# EAGLE board IC4KL_due_cont (EAGLE 9.6.2)
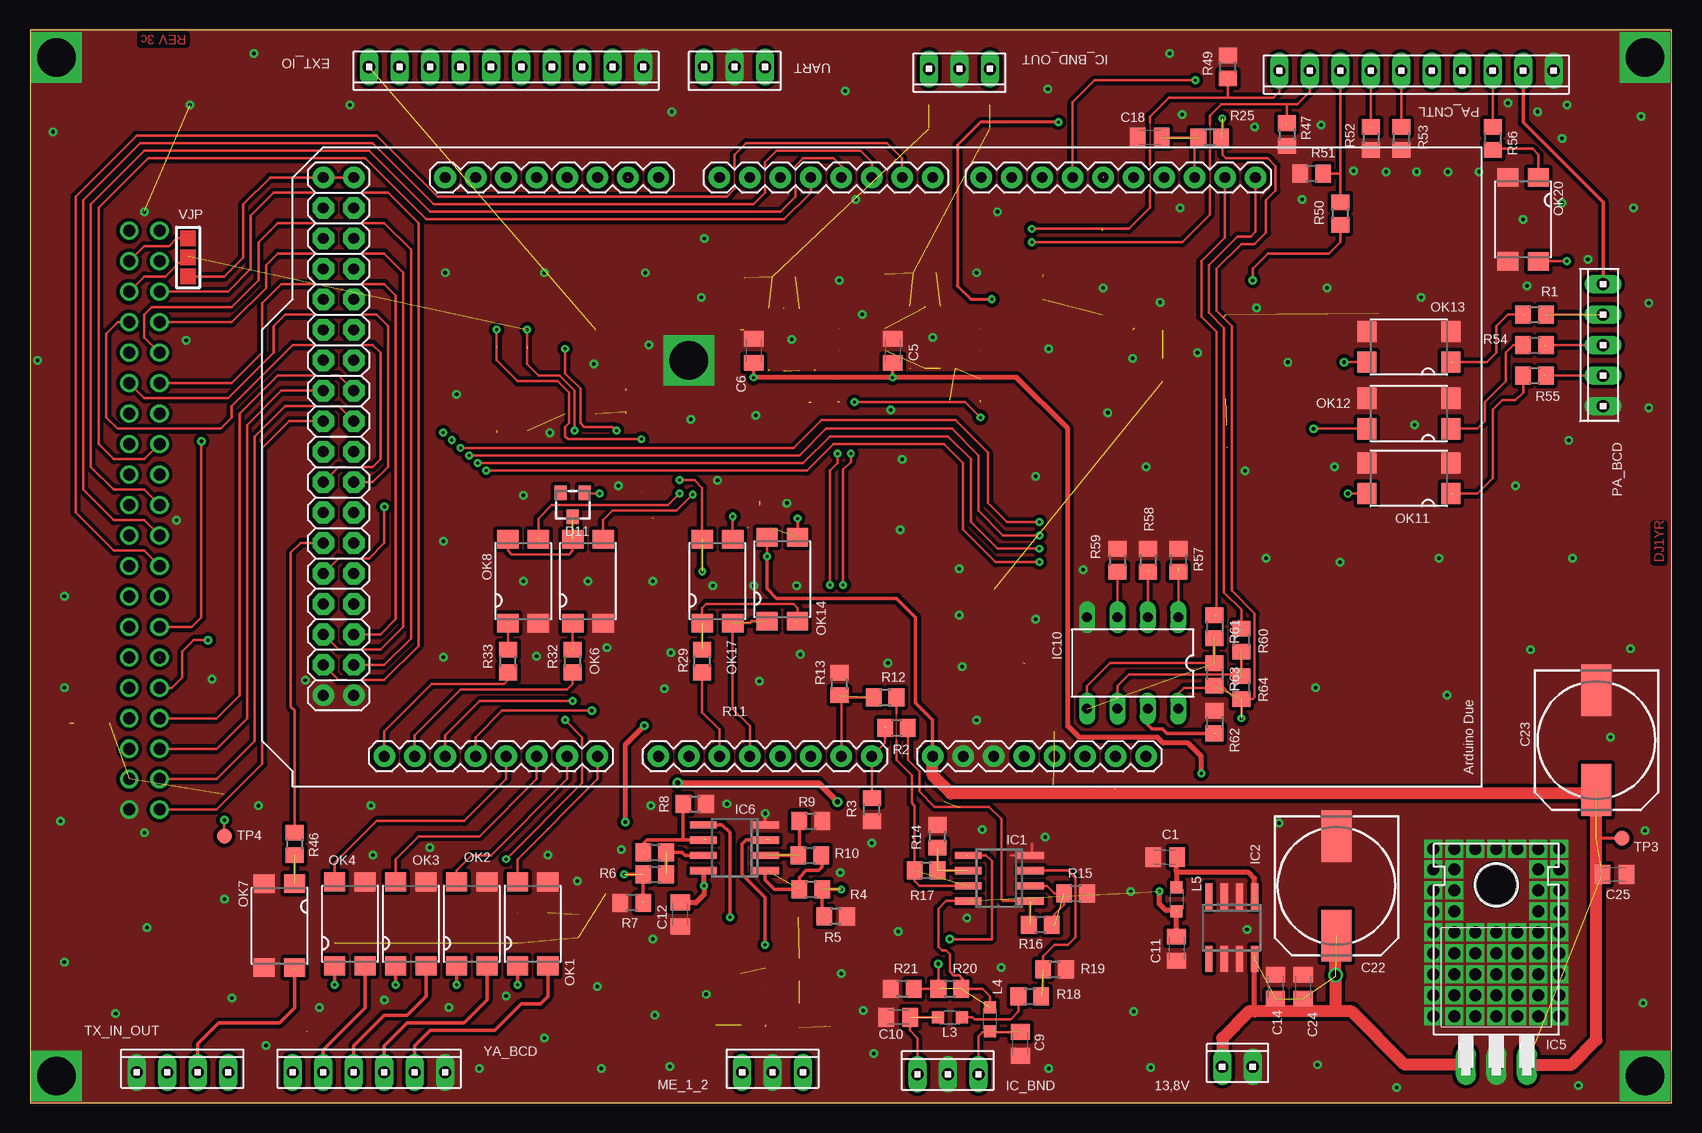
[diagram p0: board, top side]
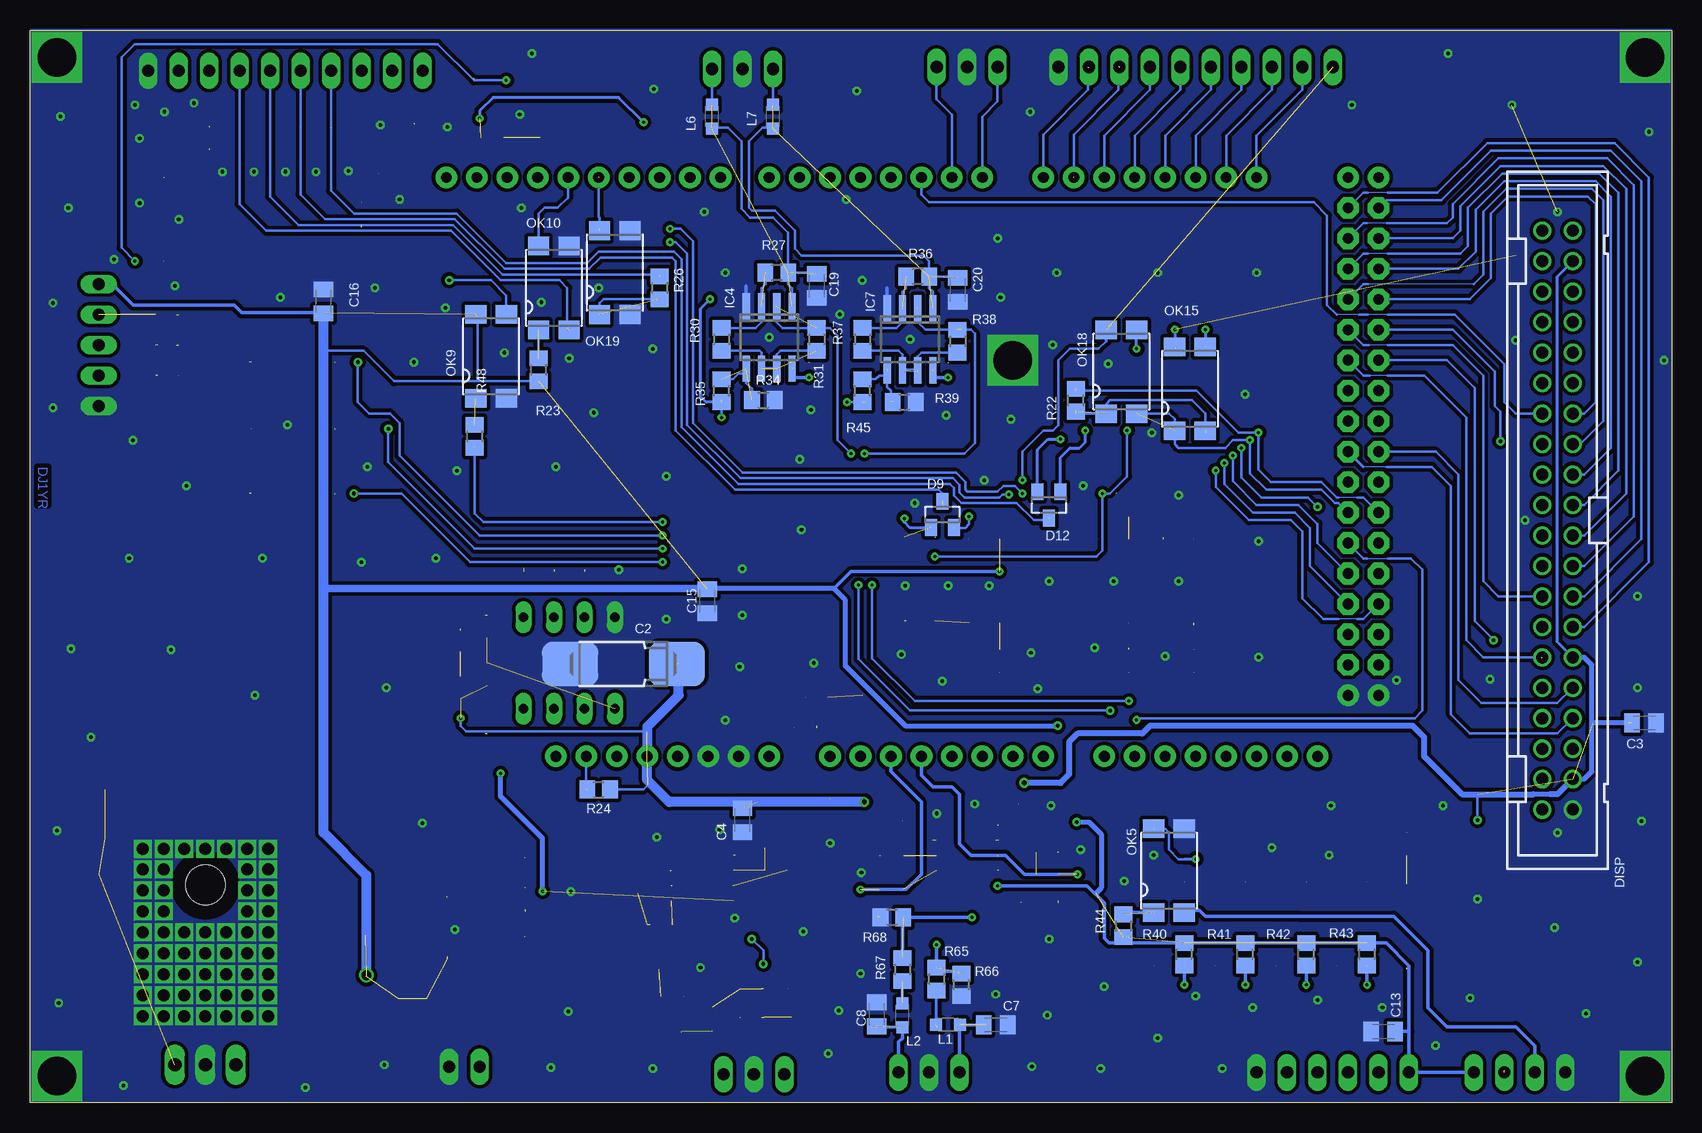
[diagram p1: board, bottom side, seen from below]

Size 136.86 x 89.44 mm. Coordinates in mm from the lower left corner, seen from the top.
Outline: 0,0 136.86,0 136.86,89.44 0,89.44 0,0
Copper layers (1*16): Top 0.035mm / dielectric 1.5mm / Bottom 0.035mm
Design rules "default *": minimum track width 10mil, minimum drill 24mil, track to track 8mil, track to pad 8mil, pad to pad 8mil, via to via 8mil, smd to smd 8mil, copper to edge 0mil, drill to drill 8mil, minimum pad ring 10mil, minimum via ring 8mil, stop-mask expansion 4mil, vias tented up to drill 0mil, thermal gap 10mil

## Footprints (pad centres in the part's own frame; a part is rotated, then mirrored left to right if it is on the bottom)
10X02MTA = drill 1.016 long: 1 1.27,0; 2 -1.27,0
C0805K = smd 1.3 x 1.6: 1 -1,0; 2 1,0
085CS_1AW = smd 4.7 x 3.7: + 4.45,0; - -4.45,0
150CLZ-1010 = smd 4.3 x 2.5: + 4.15,0; - -4.15,0
SOT23 = smd 1 x 1.4: 1 -0.95,-1.1; 2 0.95,-1.1; 3 0,1.1
TO236 = smd 1 x 1.2: A -1,-1; C 0,1; NC 1,-1
PAK100/2500-40 = drill 1 pad 1.422: 1 -24.13,-1.27; 2 -24.13,1.27; 3 -21.59,-1.27; 4 -21.59,1.27; 5 -19.05,-1.27; 6 -19.05,1.27; 7 -16.51,-1.27; 8 -16.51,1.27; 9 -13.97,-1.27; 10 -13.97,1.27; 11 -11.43,-1.27; 12 -11.43,1.27; 13 -8.89,-1.27; 14 -8.89,1.27; 15 -6.35,-1.27; 16 -6.35,1.27; 17 -3.81,-1.27; 18 -3.81,1.27; 19 -1.27,-1.27; 20 -1.27,1.27; 21 1.27,-1.27; 22 1.27,1.27; 23 3.81,-1.27; 24 3.81,1.27; 25 6.35,-1.27; 26 6.35,1.27; 27 8.89,-1.27; 28 8.89,1.27; 29 11.43,-1.27; 30 11.43,1.27; 31 13.97,-1.27; 32 13.97,1.27; 33 16.51,-1.27; 34 16.51,1.27; 35 19.05,-1.27; 36 19.05,1.27; 37 21.59,-1.27; 38 21.59,1.27; 39 24.13,-1.27; 40 24.13,1.27
10X10MTA = drill 1.016 long: 1 11.43,0; 2 8.89,0; 3 6.35,0; 4 3.81,0; 5 1.27,0; 6 -1.27,0; 7 -3.81,0; 8 -6.35,0; 9 -8.89,0; 10 -11.43,0
SO08 = smd 0.6 x 2.2: 1 -1.905,-2.6; 2 -0.635,-2.6; 3 0.635,-2.6; 4 1.905,-2.6; 5 1.905,2.6; 6 0.635,2.6; 7 -0.635,2.6; 8 -1.905,2.6
TO220H = drill 1.118 long: 1 -2.54,-10.16; 2 0,-10.16; 3 2.54,-10.16 | hole 3.302: 0,4.826
DIL08 = drill 0.813 long: 1 -3.81,-3.81; 2 -1.27,-3.81; 3 1.27,-3.81; 4 3.81,-3.81; 5 3.81,3.81; 6 1.27,3.81; 7 -1.27,3.81; 8 -3.81,3.81
10X03MTA = drill 1.016 long: 1 2.54,0; 2 0,0; 3 -2.54,0
L2012C = smd 1 x 1: 1 -1,0; 2 1,0
SMD4 = smd 1.78 x 1.55: 1 -1.27,-3.5; 2 1.27,-3.5; 3 1.27,3.5; 4 -1.27,3.5
10X05MTA = drill 1.016 long: 1 5.08,0; 2 2.54,0; 3 0,0; 4 -2.54,0; 5 -5.08,0
R0805 = smd 1.3 x 1.5: 1 -0.95,0; 2 0.95,0
B1,27 = smd 1.27 x 1.27: TP 0,0
10X04MTA = drill 1.016 long: 1 3.81,0; 2 1.27,0; 3 -1.27,0; 4 -3.81,0
10X06MTA = drill 1.016 long: 1 6.35,0; 2 3.81,0; 3 1.27,0; 4 -1.27,0; 5 -3.81,0; 6 -6.35,0

## Placement (x,y rotation side)
13,8V  [10X02MTA]  100.65,3.02 0 top
C1  [C0805K]  94.61,20.48 180 top
C2  [085CS_1AW]  87.39,36.59 0 bottom
C3  [C0805K]  2.3,31.67 0 bottom
C4  [C0805K]  77.47,23.57 270 bottom
C5  [C0805K]  71.91,62.71 90 top
C6  [C0805K]  60.33,62.71 90 top
C7  [C0805K]  56.36,6.51 180 bottom
C8  [C0805K]  66.28,7.38 90 bottom
C9  [C0805K]  82.55,4.92 270 top
C10  [C0805K]  72.39,7.14 0 top
C11  [C0805K]  95.57,12.86 270 top
C12  [C0805K]  54.21,15.72 90 top
C13  [C0805K]  24.05,5.95 0 bottom
C14  [C0805K]  103.82,9.68 90 top
C15  [C0805K]  80.41,41.83 90 bottom
C16  [C0805K]  112.39,66.83 270 bottom
C18  [C0805K]  93.34,80.49 0 top
C19  [C0805K]  71.28,68.1 270 bottom
C20  [C0805K]  59.53,67.79 270 bottom
C22  [150CLZ-1010]  108.9,18.1 270 top
C23  [150CLZ-1010]  130.57,30.24 270 top
C24  [C0805K]  106.12,9.68 90 top
C25  [C0805K]  132.08,19.05 0 top
D9  [SOT23]  60.8,49.05 0 bottom
D11  BZX84CSMD  [TO236]  45.24,49.85 180 top
D12  [SOT23]  51.91,49.85 180 bottom
DISP  2540-  [PAK100/2500-40]  9.53,48.58 90 bottom
EXT_IO  [10X10MTA]  39.69,86.36 180 top
IC1  LM358D  [SO08]  80.8,18.73 90 top
IC2  78L10SMD  [SO08]  100.17,14.61 180 top
IC4  LM358D  [SO08]  75.25,63.82 180 bottom
IC5  7805T  [TO220H]  122.24,13.34 0 top
IC6  LM358D  [SO08]  58.74,21.27 90 top
IC7  LM358D  [SO08]  63.5,63.66 180 bottom
IC10  AT24CP  [DIL08]  91.92,36.67 180 top
IC_BND  [10X03MTA]  76.52,2.38 0 top
IC_BND_OUT  [10X03MTA]  77.47,86.2 180 top
L1  [L2012C]  60.33,6.51 180 bottom
L2  [L2012C]  64.14,7.3 90 bottom
L3  [L2012C]  76.68,7.14 0 top
L4  [L2012C]  80.01,6.99 90 top
L5  [L2012C]  95.57,16.99 270 top
L6  [L2012C]  80.01,82.23 90 bottom
L7  [L2012C]  74.93,82.23 90 bottom
ME_1_2  [10X03MTA]  61.91,2.54 0 top
OK1  SFH6186-3  [SMD4]  41.91,14.92 0 top
OK2  SFH6186-3  [SMD4]  36.83,14.92 0 top
OK3  SFH6186-3  [SMD4]  31.75,14.92 0 top
OK4  SFH6186-3  [SMD4]  26.67,14.92 0 top
OK5  SFH6186-3  [SMD4]  41.91,19.37 0 bottom
OK6  SFH6186-3  [SMD4]  46.51,43.5 0 top
OK7  SFH6186-3  [SMD4]  20.8,14.76 180 top
OK8  SFH6186-3  [SMD4]  41.12,43.5 0 top
OK9  SFH6186-3  [SMD4]  98.42,62.23 0 bottom
OK10  SFH6186-3  [SMD4]  93.19,67.94 0 bottom
OK11  SFH6186-3  [SMD4]  114.94,52.07 90 top
OK12  SFH6186-3  [SMD4]  114.94,57.47 90 top
OK13  SFH6186-3  [SMD4]  114.94,63.02 90 top
OK14  SFH6186-3  [SMD4]  62.71,43.66 0 top
OK15  SFH6186-3  [SMD4]  40.16,59.53 0 bottom
OK17  SFH6186-3  [SMD4]  57.31,43.5 0 top
OK18  SFH6186-3  [SMD4]  45.88,60.96 0 bottom
OK19  SFH6186-3  [SMD4]  88.11,69.22 0 bottom
OK20  SFH6186-3  [SMD4]  124.46,73.66 180 top
PA_BCD  [10X05MTA]  131.13,63.18 90 top
PA_CNTL  [10X10MTA]  115.57,86.04 180 top
R1  1k  [R0805]  125.41,65.72 0 top
R2  1k  [R0805]  72.23,31.27 0 top
R3  1.8k  [R0805]  70.17,24.45 90 top
R4  1k  [R0805]  65.09,17.78 180 top
R5  1.8k  [R0805]  67.15,15.56 180 top
R6  1k  [R0805]  52.07,19.05 0 top
R7  1.8k  [R0805]  50.16,16.67 180 top
R8  220k  [R0805]  55.4,24.92 0 top
R9  220k  [R0805]  65.09,23.5 0 top
R10  1k  [R0805]  65.01,20.64 0 top
R11  1k  [R0805]  52.07,20.88 0 top
R12  1k  [R0805]  71.28,33.81 0 top
R13  1.8k  [R0805]  67.47,34.92 90 top
R14  220k  [R0805]  75.64,22.23 90 top
R15  220k  [R0805]  87.15,17.46 0 top
R16  1k  [R0805]  84.22,14.84 180 top
R17  1k  [R0805]  74.69,19.37 180 top
R18  1k  [R0805]  83.34,8.89 0 top
R19  10k  [R0805]  85.41,11.11 180 top
R20  1k  [R0805]  76.68,9.53 0 top
R21  10k  [R0805]  72.71,9.53 0 top
R22  1k  [R0805]  49.69,58.58 90 bottom
R23  1k  [R0805]  94.46,61.12 90 bottom
R24  10  [R0805]  89.46,26.11 0 bottom
R25  10  [R0805]  98.35,80.49 180 top
R26  1k  [R0805]  84.38,67.94 270 bottom
R27  100k  [R0805]  74.61,69.22 180 bottom
R29  1k  [R0805]  56.04,36.83 90 top
R30  22k  [R0805]  79.22,63.66 270 bottom
R31  100k  [R0805]  71.28,63.66 270 bottom
R32  1k  [R0805]  45.24,36.83 90 top
R33  1k  [R0805]  39.85,36.83 90 top
R34  22k  [R0805]  75.72,58.58 0 bottom
R35  22k  [R0805]  79.22,59.37 90 bottom
R36  100k  [R0805]  62.87,68.9 180 bottom
R37  22k  [R0805]  67.47,63.66 270 bottom
R38  100k  [R0805]  59.53,63.5 270 bottom
R39  22k  [R0805]  63.98,58.42 0 bottom
R40  1k  [R0805]  40.64,12.38 90 bottom
R41  1k  [R0805]  35.56,12.38 90 bottom
R42  1k  [R0805]  30.48,12.38 90 bottom
R43  1k  [R0805]  25.4,12.38 90 bottom
R44  1k  [R0805]  45.72,14.76 270 bottom
R45  22k  [R0805]  67.47,59.37 90 bottom
R46  390R  [R0805]  22.07,21.59 270 top
R47  100k  [R0805]  104.78,80.72 270 top
R48  1k  [R0805]  99.77,55.56 90 bottom
R49  100k  [R0805]  99.85,86.36 90 top
R50  10  [R0805]  109.22,74.14 90 top
R51  100k  [R0805]  106.84,77.47 180 top
R52  100k  [R0805]  111.76,80.41 270 top
R53  100k  [R0805]  114.3,80.41 270 top
R54  1k  [R0805]  125.41,63.18 0 top
R55  1k  [R0805]  125.41,60.64 0 top
R56  1k  [R0805]  121.92,80.41 270 top
R57  1k  [R0805]  95.73,45.24 270 top
R58  1k  [R0805]  93.19,45.24 270 top
R59  1k  [R0805]  90.65,45.24 270 top
R60  1k  [R0805]  100.97,38.58 270 top
R61  1k  [R0805]  98.74,39.69 270 top
R62  1k  [R0805]  98.74,31.75 270 top
R63  1k  [R0805]  98.74,35.72 270 top
R64  1k  [R0805]  100.97,34.61 270 top
R65  1k  [R0805]  61.28,10.32 90 bottom
R66  2k2  [R0805]  59.21,9.84 90 bottom
R67  1k  [R0805]  64.14,11.11 270 bottom
R68  2k2  [R0805]  65.01,15.48 0 bottom
TP3  TPB1,27  [B1,27]  132.72,22.07 0 top
TP4  TPB1,27  [B1,27]  16.19,22.23 0 top
TX_IN_OUT  [10X04MTA]  12.7,2.54 0 top
UART  [10X03MTA]  58.74,86.36 180 top
YA_BCD  [10X06MTA]  28.26,2.54 0 top

## Library data of the parts
13,8V IC_BND IC_BND_OUT ME_1_2 PA_BCD TX_IN_OUT UART YA_BCD = con-amp; OC_FARNELL: unknown; OC_NEWARK: unknown
C1-C16 C18-C20 C22-C25 L1-L7 R1-R27 R29-R68 = rcl
D9 D11 D12 = diode
DISP = con-3m; OC_FARNELL: unknown; OC_NEWARK: unknown
EXT_IO PA_CNTL = con-amp
IC1 IC2 IC4-IC7 = linear
IC10 = atmel; MPN: AT24C1024BW-SH-B; OC_FARNELL: 1362646; OC_NEWARK: 03P2044
OK1-OK15 OK17-OK20 = optocoupler; MF: VISHAY/TELEFUNKEN; MPN: SFH6186-3; OC_FARNELL: 1469529; OC_NEWARK: 21H7751
TP3 TP4 = testpad

## Nets
3.3V: C2.+ C3.1 C4.1 DISP.3 DISP.11 DISP.37 IC10.8 R24.2 R25.1 R35.1 R45.1 R63.2 R64.2 TP4.TP
5VIN: C23.+ C25.1 D11.A DISP.35 IC5.3 OK14.4 OK15.4 TP3.TP
10V_BND_OPV: C5.1 C6.1 IC1.8 IC4.8 IC7.8
12V: 13,8V.2 C12.2 C13.2 C14.1 C15.2 C16.2 C22.+ C24.1 EXT_IO.1 IC2.8 IC5.1 IC6.8 OK9.4 OK17.4 OK18.4 PA_BCD.1 PA_CNTL.9 R23.1 R40.2 R41.2 R42.2 R43.2 R44.2 TX_IN_OUT.1 YA_BCD.6
BCDA: OK1.4
BCDB: OK2.4
BCDC: OK3.4
BCDD: OK4.4
CS: DISP.29
DAC_IC_BND_OUT: IC4.2 R31.1
DAC_IC_BND_REF_OUT: IC7.2 R38.1
DB0: DISP.2
DB1: DISP.4
DB2: DISP.6
DB3: DISP.8
DB4: DISP.10
DB5: DISP.12
DB6: DISP.14
DB7: DISP.16
DB8: DISP.13
DB9: DISP.15
DB10: DISP.17
DB11: DISP.19
DB12: DISP.21
DB13: DISP.23
DB14: DISP.25
DB15: DISP.27
GND: 13,8V.1 C1.2 C2.- C3.2 C4.2 C5.2 C6.2 C7.1 C8.2 C9.2 C10.1 C11.2 C12.1 C13.1 C14.2 C15.1 C16.1 C18.1 C19.2 C20.2 C22.- C23.- C24.2 C25.2 DISP.1 EXT_IO.10 IC1.4 IC2.2 IC2.3 IC2.6 IC2.7 IC4.4 IC5.2 IC6.4 IC7.4 IC10.4 IC_BND.2 IC_BND_OUT.2 ME_1_2.2 OK1.3 OK2.3 OK3.3 OK4.3 OK5.3 OK6.2 OK7.2 OK7.3 OK8.2 OK9.2 OK10.3 OK11.2 OK11.3 OK12.2 OK12.3 OK13.2 OK13.3 OK19.2 OK19.3 OK20.2 OK20.3 PA_BCD.5 PA_CNTL.10 R3.1 R5.1 R7.2 R8.2 R9.2 R13.2 R14.2 R15.2 R19.1 R21.1 R34.2 R39.2 R47.2 R49.2 R51.2 R52.2 R53.2 R57.1 R58.1 R59.1 R62.1 R66.1 R68.1 TX_IN_OUT.4 UART.2 YA_BCD.1
IC_B: OK11.4
IC_BND: R2.1 R3.2
IC_BND_IN: C10.2 IC_BND.3 L3.1
IC_BND_OUT: IC_BND_OUT.3 L6.2
IC_BND_REF_IN: C9.1 IC_BND.1 L4.1
IC_BND_REF_OUT: IC_BND_OUT.1 L7.2
IC_C: OK12.4
IC_D: OK13.4
LIN: R33.1
LINEAR: OK8.3 PA_CNTL.1 R49.1
M1: C7.2 L1.1 ME_1_2.3
M2: C8.1 L2.1 ME_1_2.1
ME1: R4.1 R5.2
ME2: R6.1 R7.1
MS1: D9.3 PA_CNTL.5 R53.1
MS2: D12.3 PA_CNTL.4 R52.1
N$1: L2.2 R67.2
N$2: IC6.1 R4.2 R10.2
N$3: OK1.1 R40.1
N$4: L1.2 R65.1
N$5: IC6.7 R6.2 R11.2
N$6: IC6.6 R8.1 R11.1
N$8: IC6.2 R9.1 R10.1
N$9: OK13.1 R1.1
N$10: PA_BCD.2 R1.2
N$13: IC1.1 R2.2 R16.2
N$14: IC1.7 R12.2 R17.2
N$15: IC1.6 R14.1 R17.1
N$16: IC1.2 R15.1 R16.1
N$19: IC7.3 R36.2 R37.1
N$20: IC1.3 R18.2 R19.2
N$21: L4.2 R20.2
N$22: L3.2 R18.1
N$24: D12.1 OK18.3
N$25: IC6.3
N$26: IC6.5
N$30: C1.1 IC2.1 L5.1
N$32: OK6.1 R32.2
N$33: OK8.1 R33.2
N$34: D11.C OK6.4 OK8.4
N$35: IC4.3 R27.2 R30.1
N$36: OK15.2 OK18.1 R22.1
N$39: IC1.5 R20.1 R21.2
N$40: C19.1 IC4.1 L6.1 R27.1
N$41: D12.2 OK15.3
N$42: IC4.6 IC4.7 R30.2 R31.2
N$43: D9.2 OK17.3
N$44: D9.1 OK14.3
N$45: IC7.6 IC7.7 R37.2 R38.2
N$46: IC4.5 R34.1 R35.2
N$47: OK2.1 R41.1
N$48: OK10.1 R23.2
N$49: OK3.1 R42.1
N$52: OK14.2 OK17.1 R29.2
N$53: OK4.1 R43.1
N$55: R24.1
N$56: C18.2 R25.2
N$57: OK19.1 R26.2
N$64: OK7.1 R46.2
N$65: IC7.5 R39.1 R45.2
N$66: OK20.1 R56.2
N$70: C20.1 IC7.1 L7.1 R36.1
N$72: EXT_IO.8
N$73: OK5.1 R44.1
N$74: OK5.2 TX_IN_OUT.3
N$75: EXT_IO.7
N$76: EXT_IO.6
N$77: EXT_IO.5
N$78: OK7.4 TX_IN_OUT.2
N$79: EXT_IO.4
N$81: EXT_IO.3
N$82: EXT_IO.2
N$83: EXT_IO.9
N$85: OK9.3 R50.1
N$88: PA_BCD.3 R54.2
N$89: OK9.1 R48.2
N$91: PA_BCD.4 R55.2
N$92: OK12.1 R54.1
N$93: OK11.1 R55.1
N$97: IC10.3 R59.2
N$98: IC10.2 R58.2
N$99: IC10.1 R57.2
N$100: IC10.7 R62.2
N$102: IC10.5 R61.2 R63.1
N$104: IC10.6 R60.2 R64.1
PRO: OK15.1 OK18.2
PROL: OK10.2 PA_CNTL.7
PROL_MCU: OK10.4
PS_ON: PA_CNTL.3 R50.2 R51.1
PSON: R48.1
REST: DISP.33
RS: DISP.7
RXD: UART.1
S$2: R67.1 R68.2
S$3: R65.2 R66.2
S$4: C11.1 L5.2
S$5: R12.1 R13.1
SCL: R60.1
SD_CLK: DISP.32
SD_CS: DISP.36
SD_DIN: DISP.34
SD_DO: DISP.30
SDA: R61.1
SWR: OK14.1 OK17.2
T_CLK: DISP.18
T_CS: DISP.20
T_DIN: DISP.22
T_DO: DISP.26
T_IRQ: DISP.28
TEMP: R22.2
TUN: R32.1
TUNER: OK6.3 PA_CNTL.2 R47.1
TXD: UART.3
TXIN: OK5.4
TXL: PA_CNTL.8 R56.1
TXL_MCU: OK20.4
TXOUT: R46.1
VC: R29.1
WAIT: PA_CNTL.6 R26.1
WAIT_MCU: OK19.4
WR: DISP.9
Y_A: OK1.2 YA_BCD.2
Y_B: OK2.2 YA_BCD.3
Y_C: OK3.2 YA_BCD.4
Y_D: OK4.2 YA_BCD.5

## Tracks (layer width: path | path; a pad name or v marks a point on that pad's centre or on a via)
3.3V  (via drill 0.25, 0.3, 0.4, 0.9 pad 1.8)  (13 unrouted)
  Top 0.203: DISP.37 9.53,71.44 11.59,71.44 12.22,72.07 13.18,72.07 | v100.97,32.07 R64.2 | R64.2 100.97,33.97 100.17,33.97 99.54,34.61 96.2,34.61 95.73,34.13 IC10.8 | R64.2 101.92,33.66 102.08,33.81 102.08,40.8 100.17,42.7 100.17,64.77 98.9,66.04 98.9,69.53 100.97,71.6 102.08,71.6 103.03,72.55 103.03,75.25 103.82,76.04 103.82,78.11 103.19,78.74 99.69,78.74 99.38,79.06 99.38,80.49 | v68.74,58.42 77.95,58.42 v79.22,57.15 | TP4.TP v16.19,23.57
  Top 0.254: v99.38,82.07 99.38,80.49 | v85.72,81.76 79.22,81.76 77.31,79.85 77.31,68.1 78.42,66.99 v80.17,66.99
  Top 0.508: v53.98,26.67 65.72,26.67 v67.31,25.08
  Bottom 0.203: R24.2 85.72,26.11 85.33,26.51 | v79.22,57.15 R35.1 79.22,58.58 | v68.74,58.42 67.31,58.42 | v100.97,32.07 100.97,31.43 100.49,30.96 85.41,30.96 | v16.19,23.57 16.19,25.72
  Bottom 0.254: DISP.37 9.53,68.9 9.53,38.42 DISP.11 | R35.1 80.49,58.42 80.96,58.9 80.96,66.2 v80.17,66.99 | v85.72,81.76 87.79,83.82 98.27,83.82 99.38,82.71 v99.38,82.07
  Bottom 0.406: DISP.11 7.3,37.15 6.67,36.51 6.67,27.62 7.3,26.99 DISP.3 | 10.16,25.72 11.51,25.72 | v67.31,25.08 76.2,25.08 | 3.65,31.67 6.59,31.67
  Bottom 0.508: v53.98,26.67 50.96,26.67 50.24,27.38 50.24,30.08 49.53,30.8 44.13,30.8 43.5,31.43 21.59,31.43 20.64,30.48 20.64,28.89 17.46,25.72 11.51,25.72 | 10.16,25.72 9.53,25.72 DISP.3
  Bottom 0.813: 82.79,36.67 82.79,33.97 85.41,31.35 v85.41,28.89 85.41,26.91 83.58,25.08 v67.31,25.08
5VIN  (via drill 0.25, 0.9 pad 1.8)  (7 unrouted)
  Top 0.203: DISP.35 9.53,68.9 11.27,68.9 13.02,70.64 | v47.47,50.8 46.35,50.8 | OK14.4 v61.44,45.56 | v45.4,56.04 45.4,59.37 44.13,60.64 42.39,60.64 41.43,61.59 v41.43,64.45
  Top 0.254: TP3.TP 130.57,22.07
  Top 0.305: v61.44,45.56 61.44,42.86 62.23,42.07 72.23,42.07 73.82,40.48 73.82,33.34 75.25,31.91 v75.25,28.89
  Top 1.016: v75.25,28.89 75.25,27.3 76.76,25.8 130.57,25.8 130.57,5.24 128.51,3.17 IC5.3
  Bottom 0.203: v61.44,45.56 47.94,45.56 47.47,46.04 v47.47,50.8 46.83,50.8 45.4,52.23 v45.4,56.04
  Bottom 0.254: v41.43,64.45 41.43,62.87
10V_BND_OPV  (via drill 0.25)  (5 unrouted)
  Top 0.305: v60.33,60.48 60.33,61.67 | v71.91,60.48 71.91,61.75
  Top 0.406: v94.14,17.62 94.14,16.59 94.69,16.03 95.65,16.03 | v97.63,27.46 97.63,28.89 96.52,30 94.46,30 93.98,30.48 87.47,30.48 86.52,31.43 86.52,56.2 82.23,60.48 v71.91,60.48 v60.33,60.48
  Bottom 0.305: v60.33,60.48 61.59,60.48 61.59,61.12 | v71.91,60.48 73.34,60.48 73.34,61.28
  Bottom 0.406: v94.14,17.62 94.14,22.07 97.63,25.56 v97.63,27.46
12V  (via drill 0.25, 0.3)  (21 unrouted)
  Top 0.203: v56.04,44.29 56.04,51.28 55.4,51.91 v54.13,51.91
  Top 0.305: PA_CNTL.9 124.46,81.76 131.13,75.09 PA_BCD.1
  Top 0.406: 56.2,19.37 v56.2,18.1 56.2,17.38 55.48,16.67 54.29,16.67 | 102.08,7.62 102.08,12.22 | v51.2,31.43 49.61,29.84 v49.61,23.42
  Top 1.016: 13,8V.2 99.38,5.4 101.6,7.62 102.08,7.62 110.17,7.62 114.62,3.17 IC5.1
  Bottom 0.203: R23.1 99.54,60.17 | 99.54,60.17 106.52,60.17 109.06,62.71 112.39,62.71 | v54.13,51.91 54.13,54.29 52.39,56.04 51.59,56.04 51.12,56.52 51.12,61.91 50.16,62.87 47.78,62.87 47.15,63.5 | 99.54,65.56 99.54,60.17
  Bottom 0.254: 47.15,63.5 OK18.4
  Bottom 0.305: 21.91,5.95 YA_BCD.6 TX_IN_OUT.1 | 21.91,5.95 21.91,11.43 23.81,13.34 45.72,13.34 | 45.72,13.34 46.91,13.34 47.31,13.73 47.31,16.67 48.74,18.1 v56.2,18.1 | PA_BCD.1 130.02,68.26 128.27,66.52 119.86,66.52 119.22,65.88 112.39,65.88 | v56.04,44.29 68.42,44.29 69.85,42.86 | 45.72,13.34 R44.2 | 23.1,5.95 21.91,5.95
  Bottom 0.406: 80.64,42.86 69.85,42.86 68.9,41.91 68.9,36.43 63.9,31.43 v51.2,31.43 | v49.61,23.42 48.58,23.42 47.55,22.38 47.55,17.94 48.02,17.46
  Bottom 0.61: 80.64,42.86 112.39,42.86
  Bottom 0.813: 112.39,65.88 112.39,62.71 112.39,42.86 112.39,22.54 108.82,18.97 108.82,10.56
BCDA  (via drill 0.9 pad 1.8)  (1 unrouted)
  Top 0.203: OK1.4 40.64,20.32 47.31,26.99 v47.31,28.89
BCDB  (via drill 0.9 pad 1.8)  (1 unrouted)
  Top 0.203: v44.77,28.89 44.77,26.99 38.42,20.64 36.83,20.64 35.56,19.37 OK2.4
BCDC  (via drill 0.9 pad 1.8)  (1 unrouted)
  Top 0.203: v42.23,28.89 42.23,26.99 37.47,22.23 32.38,22.23 30.48,20.32 OK3.4
BCDD  (via drill 0.9 pad 1.8)  (1 unrouted)
  Top 0.203: v39.69,28.89 39.69,26.99 36.2,23.5 28.89,23.5 25.4,20 OK4.4
CS  (via drill 0.9 pad 1.8)
  Top 0.102: 23.65,65.72 27.78,65.72
  Top 0.203: DISP.29 9.53,58.74 16.51,58.74 20.32,62.55 20.32,64.77 21.27,65.72 23.65,65.72 | v26.99,51.75 28.57,51.75 29.84,53.02 29.84,64.77 28.89,65.72 27.78,65.72
DAC_IC_BND_OUT  (via drill 0.25, 0.3, 0.9 pad 1.8)  (2 unrouted)
  Top 0.203: v46.83,32.7 39.37,32.7 37.15,30.48 v37.15,28.89 | v67.79,43.18 67.79,52.78 68.42,53.42 v68.42,54.13
  Bottom 0.203: v46.83,32.7 63.5,32.7 67.79,36.99 v67.79,43.18 | v68.42,54.13 69.53,55.24 69.53,63.98 70.17,64.61 74.14,64.61 74.61,65.09 74.61,66.36
DAC_IC_BND_REF_OUT  (via drill 0.25, 0.9 pad 1.8)  (3 unrouted)
  Top 0.203: v45.24,33.5 37.47,33.5 34.61,30.64 v34.61,28.89 | v66.67,43.18 66.67,52.7 67.31,53.34 v67.31,54.13
  Bottom 0.203: v45.24,33.5 63.1,33.5 66.67,37.07 v66.67,43.18 | 59.21,64.45 58.42,64.45 58.1,64.14 58.1,55.01 58.98,54.13 v67.31,54.13 | R38.1 62.23,64.45 62.87,65.09 62.87,66.2
DB0  (via drill 0.9 pad 1.8)
  Top 0.203: DISP.2 15.56,24.45 19.37,28.26 19.37,54.61 21.59,56.83 v24.45,56.83
DB1  (via drill 0.9 pad 1.8)
  Top 0.102: 23.65,58.1 25.08,58.1
  Top 0.203: DISP.4 15.56,26.99 18.73,30.16 18.73,55.56 21.27,58.1 23.65,58.1 | v26.99,56.83 25.72,58.1 25.08,58.1
DB2  (via drill 0.9 pad 1.8)
  Top 0.203: DISP.6 15.56,29.53 18.1,32.07 18.1,56.52 20.95,59.37 v24.45,59.37
DB3  (via drill 0.9 pad 1.8)
  Top 0.102: 23.65,60.64 25.16,60.64
  Top 0.203: DISP.8 15.56,32.07 17.46,33.97 17.46,57.47 20.64,60.64 23.65,60.64 | v26.99,59.37 25.72,60.64 25.16,60.64
DB4  (via drill 0.3, 0.9 pad 1.8)
  Top 0.203: v14.84,38.58 13.65,38.58 12.7,37.62 12.7,35.48 11.83,34.61 DISP.10
  Bottom 0.203: v24.45,61.91 18.73,61.91 16.43,59.61 16.43,40.16 v14.84,38.58
DB5  (via drill 0.9 pad 1.8)  (1 unrouted)
  Bottom 0.102: 23.65,60.64 25.16,60.64
  Bottom 0.203: 10.87,37.15 15.72,37.15 17.14,38.58 17.14,57.15 20.64,60.64 23.65,60.64 | 25.16,60.64 25.72,60.64 v26.99,61.91
DB6  (via drill 0.3, 0.9 pad 1.8)
  Top 0.203: DISP.14 13.49,39.69 14.29,40.48 v14.29,55.17
  Bottom 0.203: v14.29,55.17 14.29,57.63 14.76,58.1 14.76,60.96 18.26,64.45 v24.45,64.45
DB7  (via drill 0.9 pad 1.8)
  Bottom 0.102: 23.65,63.18 25.24,63.18
  Bottom 0.203: DISP.16 14.45,42.23 15.72,43.5 15.72,60.64 18.26,63.18 23.65,63.18 | 25.24,63.18 25.72,63.18 v26.99,64.45
DB8  (via drill 0.9 pad 1.8)
  Bottom 0.102: 23.65,75.88 25.32,75.88
  Bottom 0.203: DISP.13 7.3,39.69 1.91,45.09 1.91,77.15 4.76,80.01 15.4,80.01 19.53,75.88 23.65,75.88 | v26.99,74.61 25.72,75.88 25.32,75.88
DB9  (via drill 0.9 pad 1.8)
  Bottom 0.203: DISP.15 7.3,42.23 2.54,46.99 2.54,76.83 5.08,79.38 15.08,79.38 19.21,75.25 23.81,75.25 v24.45,74.61
DB10  (via drill 0.9 pad 1.8)
  Bottom 0.102: 23.73,73.34 25.4,73.34
  Bottom 0.203: DISP.17 7.3,44.77 3.17,48.9 3.17,76.52 5.4,78.74 14.45,78.74 18.26,74.93 18.26,73.82 18.73,73.34 23.73,73.34 | v26.99,72.07 25.72,73.34 25.4,73.34
DB11  (via drill 0.9 pad 1.8)
  Bottom 0.203: DISP.19 7.3,47.31 3.81,50.8 3.81,76.2 5.71,78.11 14.29,78.11 17.62,74.77 17.62,72.71 18.26,72.07 v24.45,72.07
DB12  (via drill 0.9 pad 1.8)
  Bottom 0.102: 23.65,70.8 25.32,70.8
  Bottom 0.203: DISP.21 7.3,49.85 4.45,52.7 4.45,75.88 6.03,77.47 14.13,77.47 16.99,74.61 16.99,71.44 17.62,70.8 23.65,70.8 | v26.99,69.53 25.72,70.8 25.32,70.8
DB13  (via drill 0.9 pad 1.8)
  Bottom 0.203: DISP.23 7.3,52.39 5.08,54.61 5.08,75.56 6.35,76.83 13.97,76.83 16.35,74.45 16.35,70.96 17.78,69.53 v24.45,69.53
DB14  (via drill 0.9 pad 1.8)
  Bottom 0.102: 16.51,68.26 25.32,68.26
  Bottom 0.203: DISP.25 7.62,54.93 5.71,56.83 5.71,75.25 6.67,76.2 13.81,76.2 15.72,74.3 15.72,69.06 16.51,68.26 | v26.99,66.99 25.72,68.26 25.32,68.26
DB15  (via drill 0.9 pad 1.8)
  Bottom 0.203: DISP.27 7.3,57.47 6.35,58.42 6.35,74.93 6.99,75.56 13.65,75.56 15.08,74.14 15.08,68.74 16.83,66.99 v24.45,66.99
GND  (via drill 0.3, 0.9 pad 1.8, 1, 3.2)  (1 unrouted)
  Top 0.203: 81.76,20.64 83.5,20.64 83.5,21.59
  Top 0.305: v61.28,24.13 61.28,23.18
  Bottom 0.305: 65.41,66.2 65.41,67.94 | 77.15,66.36 77.15,68.1
  other vias: 2.22,87.15 2.22,2.22 134.62,2.22 134.62,87.15 54.93,61.91 9.53,22.54 15.16,35.32 12.22,48.58 118.75,12.46 117,12.46 117,14.21 120.49,12.46 117,15.95 118.75,15.95 123.98,21.19 125.73,21.19 117,19.45 117,21.19 118.75,21.19 120.49,21.19 122.24,21.19 127.48,21.19 117,17.7 118.75,19.45 118.75,17.7 125.73,19.45 127.48,19.45 118.75,14.21 125.73,15.95 127.48,15.95 125.73,17.7 127.48,17.7 120.49,14.21 122.24,14.21 123.98,14.21 125.73,14.21 127.48,14.21 72.55,47.78 51.91,43.5 71.52,36.67 77.47,40.64 78.9,31.91 41.12,43.5 41.12,50.64 47.31,9.68 67.63,10.79 70.17,21.67 51.91,13.65 52.07,7.3 56.36,9.05 104.14,23.34 42.86,5.4 51.75,24.77 58.1,24.92 60.8,35.16 63.9,43.1 56.91,43.1 46.51,43.5 57.31,51.91 63.1,50.01 60.48,57.31 71.75,57.78 91.92,62.07 51.28,69.22 56.2,72.07 95.89,74.61 94.22,66.75 34.61,69.22 68.82,75.33 67.47,68.58 55.09,56.99 26.67,83.19 69.45,7.7 77.47,44.53 109.22,45.09 104.85,61.75 83.82,40.32 103.03,45.4 107.16,34.61 45.64,18.49 91.76,17.62 101.44,14.45 43.18,20.64 33.34,21.27 28.57,20.64 39.69,8.89 34.92,7.94 29.53,8.57 24.13,7.94 37.47,2.86 47.62,2.86 53.34,3.02 70.33,4.13 67.55,19.21 49.29,21.11 19.68,4.76 53.5,82.63 113.03,77.63 118.19,77.63 134.94,66.67 115.57,77.63 51.59,63.18 42.86,69.22 55.96,67.15 102.08,81.36 93.03,53.02 101.28,52.7 87.79,44.45 108.74,53.02 108.11,67.94 77.71,36.35 118.11,33.97 117.47,45.4 115.41,56.52 115.97,67.15 124.78,68.1 123.83,51.44 125.09,37.78 22.94,35.24 2.86,11.75 34.45,37.15 34.45,46.83 48.1,37.94 60.33,43.1 52.86,34.53 113.9,1.27 84.93,2.86 28.42,24.77 19.05,24.77 16.19,16.99 107.31,3.17 16.83,8.73 7.14,7.46 2.54,23.5 2.86,34.61 2.86,42.23 13.34,83.19 1.91,80.96 0.64,61.91 13.02,63.58 9.53,74.3 35.56,59.05 92,7.62 131.76,30.48 128.59,45.4 128.27,55.24 134.94,57.94 129.86,70.33 133.67,74.61 124.46,73.66 134.3,82.23 89.46,67.94 102.23,66.28 89.85,57.55 67.94,84.38 69.37,65.72 97.31,62.55 96.04,82.39 80.96,11.27 72.39,14.29 84.61,22.15 78.11,15.4 84.93,62.87 83.82,52.23 72.71,53.66 46.99,61.59 64.21,37.39 53.42,37.54 42.23,37.23 49.05,51.44 43.34,55.88 75.25,63.82 63.5,63.66 78.9,69.22 80.64,74.3 106.05,75.33 107.63,81.52 110.33,77.71 120.81,77.63 123.19,83.34 127.71,75.01 18.65,87.47 84.85,84.53 95.01,87.47 125.65,82.63 127.71,80.41 128.11,83.19 122.24,12.46 123.98,12.46 125.73,12.46 127.48,12.46 127.48,10.72 125.73,10.72 123.98,10.72 122.24,10.72 120.49,10.72 118.75,10.72 117,10.72 117,8.97 118.75,8.97 120.49,8.97 122.24,8.97 123.98,8.97 125.73,8.97 127.48,8.97 117,7.22 118.75,7.22 120.49,7.22 122.24,7.22 123.98,7.22 125.73,7.22 127.48,7.22 93.42,2.94 129.06,1.43 134.46,8.33 134.62,22.7 133.43,37.86 9.76,14.61 79.38,22.78 24.45,33.97 26.99,33.97 77.79,28.89 80.33,28.89
  pour Top (isolate 0.305, no thermals): 0,89.53 136.84,89.53 136.84,0 0,0
  pour Bottom (isolate 0.305, no thermals): 0,89.53 136.84,89.53 136.84,0 0,0
IC_B  (via drill 0.25, 0.3, 0.9 pad 1.8)  (1 unrouted)
  Top 0.203: v109.86,50.8 OK11.4 | v84.14,45.09 80.49,45.09 77.79,47.78 77.79,53.34 76.2,54.93 66.99,54.93 64.77,52.7 v38.02,52.7
  Bottom 0.102: 26.19,40.32 27.78,40.32
  Bottom 0.203: v109.86,50.8 105.89,50.8 100.17,45.09 v84.14,45.09 | v24.45,41.59 25.72,40.32 26.19,40.32 | v38.02,52.7 38.02,51.36 35.24,48.58 31.75,48.58 30.8,47.62 30.8,42.07 29.05,40.32 27.78,40.32
IC_BND  (via drill 0.9 pad 1.8)  (2 unrouted)
  Top 0.203: 71.28,31.43 71.28,30 v70.17,28.89 70.17,25.32
IC_BND_IN  (2 unrouted)
  Top 0.203: IC_BND.3 73.98,5.4 73.34,6.03 73.34,7.14 75.88,7.14
IC_BND_OUT  (2 unrouted)
  Bottom 0.203: 73.34,66.36 73.34,67.94 73.66,68.26 73.66,69.22 | 71.28,69.06 71.44,69.22 73.66,69.22 | 73.66,69.22 73.66,72.55 74.93,73.82 76.83,73.82 77.55,74.53 77.55,80.17 78.66,81.28 80.01,81.28 | 80.01,85.57 IC_BND_OUT.3 80.01,83.19
IC_BND_REF  (via drill 0.9 pad 1.8)
  Top 0.203: v67.63,28.89 67.63,33.97 67.79,33.81 70.33,33.81
IC_BND_REF_IN  (2 unrouted)
  Top 0.203: IC_BND.1 79.06,5.56 79.38,5.87 82.55,5.87
IC_BND_REF_OUT  (2 unrouted)
  Bottom 0.203: 74.93,85.41 IC_BND_OUT.1 74.93,83.19 | 61.59,66.2 61.59,67.63 61.91,67.94 61.91,68.9 | 59.53,68.74 59.69,68.9 61.91,68.9 | 61.91,68.9 61.91,70.17 62.39,70.64 72.55,70.64 73.1,71.2 73.1,72.71 74.77,74.37 76.68,74.37 76.91,74.61 76.91,80.17 75.8,81.28 74.93,81.28
IC_C  (via drill 0.25, 0.3, 0.9 pad 1.8)  (1 unrouted)
  Top 0.203: v107,56.2 OK12.4 | v84.14,46.2 80.64,46.2 78.42,48.42 78.42,53.66 76.52,55.56 66.67,55.56 64.45,53.34 v37.31,53.34
  Bottom 0.203: v107,56.2 107,53.42 99.77,46.2 v84.14,46.2 | v26.99,41.59 30.16,44.77 30.16,47.94 31.43,49.21 34.92,49.21 37.31,51.59 v37.31,53.34
IC_D  (via drill 0.25, 0.3, 0.9 pad 1.8)  (1 unrouted)
  Top 0.203: v84.14,47.31 81.12,47.31 79.06,49.37 79.06,53.98 76.83,56.2 66.36,56.2 64.14,53.98 v36.59,53.98 | v109.54,61.75 OK13.4
  Bottom 0.203: v36.59,53.98 36.59,51.83 34.61,49.85 31.11,49.85 29.53,48.26 29.53,46.67 v26.99,44.13 | v84.14,47.31 99.38,47.31 106.05,53.98 106.05,56.67 106.84,57.47 108.58,57.47 109.54,58.42 v109.54,61.75
LIN  (via drill 0.9 pad 1.8)  (1 unrouted)
  Top 0.203: R33.1 39.85,35.24 39.53,34.92 33.5,34.92 29.53,30.96 v29.53,28.89
LINEAR  (via drill 0.25)  (2 unrouted)
  Top 0.102: 93.34,81.76 93.34,79.38 | 93.34,78.26 93.34,76.04
  Top 0.2: 93.34,74.61 93.34,76.04 | 93.34,78.26 93.34,79.38 | 93.34,82.23 93.34,81.76
  Top 0.203: 42.39,47.15 42.39,48.74 43.5,49.85 53.18,49.85 v54.13,50.8 | 93.34,74.61 91.6,72.87 v83.5,72.87 | PA_CNTL.1 104.14,84.3 103.66,83.82 99.85,83.82 | 99.85,83.82 94.93,83.82 93.34,82.23 | 99.85,85.33 99.85,83.82
  Bottom 0.203: v54.13,50.8 54.77,51.44 55.72,51.44 56.2,50.96 58.74,50.96 58.9,51.12 58.9,51.75 59.69,52.55 77.47,52.55 81.6,56.67 81.6,71.83 82.63,72.87 v83.5,72.87
M1  (2 unrouted)
  Bottom 0.254: 59.37,6.51 57.15,6.51
  Bottom 0.305: ME_1_2.3 59.37,6.51
M2  (2 unrouted)
  Bottom 0.254: 66.67,6.35 64.14,6.35
  Bottom 0.305: ME_1_2.1 64.45,5.08 64.14,5.4 64.14,6.35
ME1  (via drill 0.25, 0.9 pad 1.8)  (2 unrouted)
  Top 0.305: 66.04,15.56 R4.1 v67.63,17.78
  Bottom 0.305: v67.63,17.78 63.82,17.78 62.55,19.05 62.55,25.08 65.09,27.62 v65.09,28.89
ME2  (via drill 0.25, 0.9 pad 1.8)  (2 unrouted)
  Top 0.305: 51.12,16.83 R6.1 v49.53,19.05
  Bottom 0.305: v49.53,19.05 53.98,19.05 55.56,20.64 58.42,20.64 59.37,21.59 59.37,25.72 60.01,26.35 61.59,26.35 62.55,27.3 v62.55,28.89
MS1  (2 unrouted)
  Top 0.203: R53.1 PA_CNTL.5
  Bottom 0.203: PA_CNTL.5 114.3,75.72 112.24,73.66 101.44,73.66 97.31,69.53 90.25,69.53 89.3,70.48 83.34,70.48 83.03,70.17 83.03,56.04 78.11,51.12 61.12,51.12 60.8,50.8 60.8,49.85
MS2  (2 unrouted)
  Top 0.203: 111.76,81.28 PA_CNTL.4
  Bottom 0.203: PA_CNTL.4 111.76,76.04 109.86,74.14 101.28,74.14 97.16,70.01 90.41,70.01 89.46,70.96 83.19,70.96 82.55,70.33 82.55,56.36 77.79,51.59 60.17,51.59 59.85,51.28 59.85,50.64 59.21,50.01 54.61,50.01 53.18,48.58 51.91,48.58 51.91,48.74
N$1  (1 unrouted)
N$2  (3 unrouted)
  Top 0.305: 61.28,19.37 61.28,18.57 62.07,17.78 R4.2 64.14,18.81 64.69,19.37 65.72,19.37 66.04,19.68 66.04,20.64
N$3  (1 unrouted)
N$4  (2 unrouted)
  Bottom 0.254: 61.28,6.35 R65.1
N$5  (3 unrouted)
  Top 0.305: 56.2,20.64 54.61,20.64 54.37,20.88 R11.2 R6.2
N$6  (3 unrouted)
  Top 0.305: 56.36,21.91 54.45,21.91 | 54.45,21.91 R8.1 | 54.45,21.91 51.44,21.91 51.2,21.67 51.2,20.88
N$7
  Bottom 0.254: 64.14,8.26 64.14,10.16
N$8  (3 unrouted)
  Top 0.305: R9.1 64.14,20.95 63.82,20.64 61.28,20.64
N$9  (2 unrouted)
  Top 0.203: 118.59,61.75 121.44,61.75 122.24,62.55 122.24,64.77 123.19,65.72 124.62,65.72
N$10  (1 unrouted)
N$11  (via drill 0.25)
  Bottom 0.305: v58.34,15.48 64.14,15.48 64.14,12.06
N$12  (via drill 0.25)
  Bottom 0.305: v61.28,13.18 61.28,10.95 59.37,10.95
N$13  (3 unrouted)
  Top 0.203: 83.34,14.92 83.34,16.83 81.12,16.83 80.96,16.99 80.96,23.65 79.93,24.69 75.41,24.69 74.14,25.96 74.14,27.62 73.18,28.57 R2.2
N$14  (3 unrouted)
  Top 0.102: 72.23,30.16 72.23,32.46 R12.2
  Top 0.203: 78.26,18.1 74.61,18.1 74.14,18.1 73.74,18.49 73.74,24.77 73.5,25 73.5,27.3 72.23,28.57 72.23,30.16 | 72.23,33.89 72.23,32.46
N$15  (2 unrouted)
N$16  (3 unrouted)
  Top 0.203: 85.41,14.84 85.41,15.72 86.2,16.51 R15.1 85.41,17.46 84.77,18.1 83.34,18.1
N$17
  Top 1.016: 130.73,25.96 130.65,25.96
N$18
  Top 0.203: 78.26,19.37 75.64,19.37 75.64,21.19
N$19  (3 unrouted)
  Bottom 0.203: 64.14,66.2 64.14,65.09 64.61,64.61 R37.1
N$20  (3 unrouted)
  Top 0.203: R18.2 84.45,9.05 84.45,12.22 85.41,13.18 86.52,13.18 87.15,13.81 87.15,18.73 86.52,19.37 83.5,19.37
N$21  (1 unrouted)
N$22  (2 unrouted)
  Top 0.203: 77.63,7.14 78.58,7.14 78.74,6.99 81.76,6.99 82.39,7.62 R18.1
N$23
  Top 0.203: 22.07,18.26 22.07,20.48
N$24  (via drill 0.25)  (2 unrouted)
  Top 0.203: v44.61,62.87 44.61,60.8 45.88,59.53 45.88,56.67 46.2,56.36 48.58,56.36 v48.9,56.04
  Bottom 0.254: D12.1 50.96,53.82 50.16,54.61 49.37,54.61 48.9,55.09 v48.9,56.04 | v44.61,62.87 OK18.3
N$25  (1 unrouted)
  Top 0.305: 61.59,21.91 59.69,21.91 59.37,21.59 59.37,19.05 61.28,17.14 61.28,13.18
N$26  (1 unrouted)
  Top 0.305: 56.2,23.18 57.71,23.18 58.34,22.54 58.34,15.56
N$28  (via drill 0.9 pad 1.8)
  Top 0.203: 13.18,68.9 16.19,68.9 17.78,70.48 17.78,74.93 20,77.15 v24.45,77.15 v26.99,77.15
N$29
  Top 0.203: 126.36,65.72 131.29,65.72
N$30  (3 unrouted)
  Top 0.406: 102.08,17.14 102.08,18.73 101.6,19.21 95.57,19.21 | 95.57,19.21 95.57,17.94 | 95.57,19.21 95.57,20.48
N$32  (2 unrouted)
  Top 0.203: 45.24,37.94 OK6.1
N$33  (2 unrouted)
  Top 0.203: R33.2 39.85,39.85
N$34  (3 unrouted)
  Top 0.203: OK8.4 39.85,46.04 40.16,45.72 44.93,45.72 45.24,46.04 45.24,48.74
N$35  (3 unrouted)
  Bottom 0.203: R30.1 76.36,64.61 75.88,65.09 75.88,67.94 75.56,68.26 R27.2
N$36  (3 unrouted)
  Bottom 0.203: 38.89,55.88 38.89,57.47 40.01,58.58 46.83,58.58 47.15,58.26 OK18.1 49.69,57.47
N$39  (via drill 0.3)  (4 unrouted)
  Top 0.203: 80.01,7.94 80.01,8.89 79.38,9.53 77.79,9.53 | 77.79,9.53 77.63,9.53 | 77.79,9.53 77.79,10.32 77.47,10.64 76.99,10.64 76.68,10.95 76.68,12.38 76.36,12.7 76.04,12.7 75.72,13.02 75.72,16.19 76.36,16.83 78.42,16.83 | 75.88,9.53 R20.1 | R20.1 R21.2 | R20.1 v75.72,11.59 | v76.68,13.65 80.17,13.65 80.17,20.16 79.69,20.64 78.11,20.64
  Bottom 0.203: v76.68,13.65 75.72,12.7 v75.72,11.59
N$40  (3 unrouted)
N$41  (via drill 0.25)  (2 unrouted)
  Top 0.203: v38.89,64.45 38.89,61.91 40.64,60.17 43.97,60.17 44.93,59.21 44.93,56.67 44.61,56.36 44.61,55.56 44.85,55.32 v50.96,55.32
  Bottom 0.254: v38.89,64.45 OK15.3 | D12.2 52.86,54.45 51.99,55.32 v50.96,55.32
N$42  (4 unrouted)
  Bottom 0.203: R30.2 76.04,62.71 75.88,62.55 75.88,61.28 74.61,61.28 74.61,62.39 74.3,62.71 R31.2
N$43  (via drill 0.25)  (2 unrouted)
  Top 0.203: OK17.3 v58.58,48.9
  Bottom 0.203: v58.58,48.9 58.58,48.26 58.9,47.94 D9.2
N$44  (1 unrouted)
N$45  (4 unrouted)
  Bottom 0.203: R38.2 62.55,62.55 62.87,62.23 62.87,61.12 | 62.87,61.12 62.87,60.96 | R37.2 64.45,62.71 64.14,62.39 64.14,61.12 62.87,61.12
N$46  (2 unrouted)
N$47  (1 unrouted)
N$48  (1 unrouted)
N$49  (1 unrouted)
N$50  (via drill 0.25)
  Top 0.254: v63.98,48.74 63.98,47.15
  Bottom 0.254: 61.75,47.94 63.5,47.94 63.98,48.42 v63.98,48.74
N$52  (3 unrouted)
  Top 0.203: R29.2 56.04,41.27 56.36,41.59 63.66,41.59 63.98,41.27 OK14.2 63.82,40.16
N$53  (1 unrouted)
N$55  (via drill 0.9 pad 1.8)  (1 unrouted)
  Bottom 0.203: 90.49,26.19 v90.49,28.89
N$56  (1 unrouted)
N$57  (1 unrouted)
N$58  (via drill 0.9 pad 1.8)
  Top 0.203: v97.08,77.15 97.08,80.49 94.3,80.49
N$59
  Bottom 0.203: 94.46,62.07 94.46,64.45
N$60
  Bottom 0.203: 84.3,66.99 89.06,66.99 89.38,66.67 89.38,65.56
N$61  (via drill 0.25)
  Top 0.305: v30.48,9.84 30.48,11.43
  Bottom 0.305: v30.48,9.84 30.48,11.43
N$62  (via drill 0.25)
  Top 0.305: v35.56,9.84 35.56,11.75
  Bottom 0.305: v35.56,9.84 35.56,11.75
N$63  (via drill 0.25)
  Top 0.305: v40.64,9.84 40.64,11.43
  Bottom 0.305: v40.64,9.84 40.64,11.43
N$64  (1 unrouted)
N$65  (3 unrouted)
  Bottom 0.203: 65.41,61.12 65.41,60.64 | 65.41,60.64 65.41,59.69 65.09,59.37 65.09,58.42 | 65.41,60.64 66.04,60.64 66.36,60.33 R45.2
N$66  (2 unrouted)
  Top 0.203: 121.92,79.53 125.25,79.53 125.73,79.06 OK20.1
N$67
  Bottom 0.305: 45.4,15.88 43.18,15.88
N$69
  Bottom 0.203: 79.22,60.33 78.26,60.33 77.79,60.8 77.15,60.8 | 77.15,61.28 77.15,60.8 | 77.15,60.8 77.15,60.01 76.68,59.53 76.68,58.58
N$70  (3 unrouted)
N$71  (via drill 0.8)
  Top 1.016: 108.82,7.7 108.82,10.48 v108.82,10.64 108.82,13.97
N$72  (via drill 0.9 pad 1.8)  (2 unrouted)
  Bottom 0.203: 49.85,77.23 49.85,80.72 46.12,84.45 46.12,86.44
  other vias: 49.85,77.15
N$73  (1 unrouted)
N$74  (1 unrouted)
  Bottom 0.305: OK5.2 40.64,16.03 39.37,16.03 38.89,15.56 31.11,15.56 23.18,15.56 20.32,12.7 20.32,7.94 18.73,6.35 13.02,6.35 11.43,4.76 TX_IN_OUT.3
N$75  (via drill 0.9 pad 1.8)
  Bottom 0.203: EXT_IO.7 43.5,84.45 47.31,80.64 v47.31,77.15
N$76  (via drill 0.9 pad 1.8)
  Bottom 0.203: EXT_IO.6 40.96,84.45 44.77,80.64 v44.77,77.15
N$77  (via drill 0.9 pad 1.8)
  Bottom 0.203: EXT_IO.5 38.42,84.45 42.23,80.64 v42.23,77.15
N$78  (2 unrouted)
  Top 0.305: 13.97,2.7 13.97,4.92 15.72,6.67 20.8,6.67 22.07,7.94 22.07,11.11
N$80
  Bottom 0.203: 64.14,66.36 64.14,67.63 63.82,67.94 63.82,68.9
N$81  (via drill 0.9 pad 1.8)
  Bottom 0.203: EXT_IO.3 33.34,84.45 37.15,80.64 v37.15,77.15
N$82  (via drill 0.9 pad 1.8)
  Bottom 0.203: EXT_IO.2 30.8,84.45 34.61,80.64 v34.61,77.15
N$83  (via drill 0.9 pad 1.8)  (1 unrouted)
  Bottom 0.203: 48.66,86.36 48.66,84.45 52.39,80.72 v52.39,77.15
N$84  (via drill 0.9 pad 1.8)
  Bottom 0.203: 35.88,86.36 35.88,84.45 39.69,80.64 v39.69,77.15
N$85  (via drill 0.3)  (2 unrouted)
  Top 0.203: 109.22,73.03 109.22,71.75 108.27,70.8 103.19,70.8 101.92,69.53 v101.92,68.58
  Bottom 0.203: v101.92,68.58 98.42,68.58 97.16,67.31 OK9.3
N$88  (1 unrouted)
  Top 0.203: PA_BCD.3 126.21,63.18
N$89  (1 unrouted)
N$91  (1 unrouted)
  Top 0.203: PA_BCD.4 126.21,60.64
N$92  (2 unrouted)
  Top 0.203: 118.43,56.2 120.65,56.2 121.28,56.83 121.28,58.42 123.03,60.17 123.03,62.55 123.67,63.18 124.62,63.18
N$93  (2 unrouted)
  Top 0.203: 118.59,50.8 120.65,50.8 121.92,52.07 121.92,57.78 122.71,58.58 123.83,58.58 124.46,59.21 R55.1
N$97  (1 unrouted)
  Top 0.203: IC10.3 90.65,44.45
N$98  (1 unrouted)
  Top 0.203: IC10.2 93.19,44.45
N$99  (1 unrouted)
  Top 0.203: IC10.1 95.73,44.61
N$100  (1 unrouted)
  Top 0.305: 98.9,30.8 94.77,30.8 94.38,31.19 93.5,31.19 93.19,31.51 IC10.7
N$102  (2 unrouted)
N$103
  Top 0.203: 98.74,36.67 90.01,36.67 88.11,34.77 88.11,33.02
  Top 0.254: 98.9,36.67 98.74,36.67 98.74,38.73
N$104  (2 unrouted)
  Top 0.203: 100.81,35.72 91.6,35.72 90.65,34.77 IC10.6
  Top 0.254: R64.1 100.81,35.72
N$105
  Top 0.203: 100.97,35.72 100.97,37.62
PRO  (via drill 0.25, 0.9 pad 1.8)  (2 unrouted)
  Bottom 0.203: v26.99,49.21 27.78,50.01 28.1,50.01 29.21,51.12 33.81,51.12 35.16,52.47 v35.16,55.24 36.59,55.24 37.23,54.61 41.12,54.61 41.43,54.93 41.43,56.99 41.91,57.47 OK18.2
PROL  (1 unrouted)
  Bottom 0.203: 92.08,64.61 92.08,67.94 92.71,68.58 97.63,68.58 101.76,72.71 117.16,72.71 119.38,74.93 PA_CNTL.7
PROL_MCU  (via drill 0.9 pad 1.8)  (1 unrouted)
  Bottom 0.203: v92,77.15 92,75.49 92.87,74.61 93.98,74.61 94.46,74.14 OK10.4
PS_ON  (2 unrouted)
  Top 0.203: PA_CNTL.3 109.22,77.47 | 109.22,77.47 R50.2 | R51.1 109.22,77.47
PSON  (via drill 0.25, 0.3, 0.9 pad 1.8)  (1 unrouted)
  Top 0.102: 26.27,45.4 27.78,45.4
  Top 0.203: v24.45,44.13 25.72,45.4 26.27,45.4 | v29.53,49.69 29.53,46.67 28.26,45.4 27.78,45.4 | v35.88,54.61 63.66,54.61 65.96,56.91 77.15,56.91 79.85,54.21 79.85,50.01 81.44,48.42 v84.14,48.42
  Bottom 0.203: v35.88,54.61 35.88,52.15 34.21,50.48 30.32,50.48 v29.53,49.69 | v84.14,48.42 99.06,48.42 99.77,49.13 99.77,54.69
REST  (via drill 0.9 pad 1.8)
  Top 0.102: 23.65,63.18 27.78,63.18 | 27.78,53.02 26.27,53.02 | 25.8,53.02 25.72,53.02
  Top 0.203: DISP.33 7.3,65.09 6.35,64.14 6.35,57.15 7.3,56.2 15.88,56.2 16.83,57.15 16.83,58.1 21.91,63.18 23.65,63.18 | 25.72,53.02 v24.45,51.75 | 27.78,63.18 28.57,63.18 29.21,62.55 29.21,53.66 28.57,53.02 27.78,53.02 | 25.8,53.02 26.27,53.02
RS  (via drill 0.9 pad 1.8)
  Bottom 0.102: 23.73,53.02 25.72,53.02
  Bottom 0.203: DISP.7 9.53,30.8 16.83,30.8 18.41,32.38 18.41,51.44 20,53.02 23.73,53.02
  Bottom 0.254: 25.72,53.02 v26.99,54.29
RXD  (via drill 0.9 pad 1.8)
  Bottom 0.203: v57.47,77.15 57.47,82.23 56.2,83.5 UART.1
S$1  (via drill 0.25)
  Top 0.305: v25.4,9.84 25.4,11.43
  Bottom 0.305: v25.4,9.84 25.4,11.11
S$2  (1 unrouted)
S$3  (1 unrouted)
S$4  (2 unrouted)
  Top 0.406: 95.57,13.89 95.57,16.11
S$5  (1 unrouted)
S$45  (via drill 0.9 pad 1.8)
  other vias: 75.25,77.15
S$46  (via drill 0.9 pad 1.8)
  other vias: 79.3,77.15
S$47  (via drill 0.9 pad 1.8)
  other vias: 81.84,77.15
S$48  (via drill 0.9 pad 1.8)
  other vias: 84.38,77.15
S$52  (via drill 0.9 pad 1.8)
  other vias: 94.54,77.15
S$60  (via drill 0.9 pad 1.8)
  other vias: 52.39,28.89
S$61  (via drill 0.9 pad 1.8)
  other vias: 54.93,28.89
S$67  (via drill 0.9 pad 1.8)
  other vias: 82.87,28.89
S$68  (via drill 0.9 pad 1.8)
  other vias: 87.95,28.89
S$70  (via drill 0.9 pad 1.8)
  other vias: 93.03,28.89
SCL  (via drill 0.9 pad 1.8)  (1 unrouted)
  Top 0.203: 100.97,39.37 100.97,41.12 99.54,42.55 99.54,64.61 98.27,65.88 98.27,69.85 100.65,72.23 101.76,72.23 102.16,72.63 v102.16,77.15
SD_CLK  (via drill 0.9 pad 1.8)
  Top 0.102: 23.73,73.34 27.86,73.34
  Top 0.203: DISP.32 9.53,63.82 9.53,65.72 10.16,66.36 16.83,66.36 19.05,68.58 19.05,71.75 20.64,73.34 23.73,73.34 | v26.99,36.51 29.53,36.51 31.75,38.73 31.75,71.12 29.53,73.34 27.86,73.34
SD_CS  (via drill 0.9 pad 1.8)
  Top 0.102: 23.65,75.88 27.86,75.88 | 27.78,35.24 26.35,35.24
  Top 0.203: DISP.36 16.51,67.63 18.41,69.53 18.41,73.98 20.32,75.88 23.65,75.88 | v24.45,36.51 25.72,35.24 26.35,35.24 | 27.86,75.88 29.84,75.88 32.38,73.34 32.38,38.1 29.53,35.24 27.78,35.24
SD_DIN  (via drill 0.9 pad 1.8)
  Top 0.102: 23.65,70.8 27.78,70.8 | 27.78,37.78 26.19,37.78
  Top 0.203: DISP.34 16.83,65.09 19.68,67.94 19.68,69.85 20.64,70.8 23.65,70.8 | v24.45,39.05 25.72,37.78 26.19,37.78 | 27.78,70.8 29.53,70.8 31.11,69.22 31.11,39.69 29.21,37.78 27.78,37.78
SD_DO  (via drill 0.9 pad 1.8)
  Top 0.102: 23.65,68.26 27.78,68.26
  Top 0.203: DISP.30 16.83,60.01 19.37,62.55 19.37,66.67 20.95,68.26 23.65,68.26 | v26.99,39.05 29.21,39.05 30.48,40.32 30.48,67.31 29.53,68.26 27.78,68.26
SDA  (via drill 0.9 pad 1.8)  (1 unrouted)
  Top 0.203: 98.9,40.64 98.9,64.29 97.63,65.56 97.63,70.17 99.62,72.15 v99.62,77.15
SWR  (via drill 0.9 pad 1.8)  (2 unrouted)
  Top 0.203: OK14.1 60.17,40.16 60.01,40.01 OK17.2 58.58,32.86 60.01,31.43 v60.01,28.89
T_CLK  (via drill 0.9 pad 1.8)
  Top 0.102: 58.74,76.36 58.74,77.95
  Top 0.203: DISP.18 9.53,46.04 6.99,46.04 3.81,49.21 3.81,75.56 8.89,80.64 28.89,80.64 33.97,75.56 58.1,75.56 58.74,76.2 58.74,76.36 | v72.71,77.15 72.71,78.74 71.44,80.01 59.69,80.01 58.74,79.06 58.74,77.95
T_CS  (via drill 0.9 pad 1.8)
  Top 0.102: 61.28,76.36 61.28,78.03
  Top 0.203: DISP.20 9.53,48.58 6.99,48.58 4.45,51.12 4.45,75.25 9.21,80.01 28.57,80.01 33.66,74.93 60.33,74.93 61.28,75.88 61.28,76.36 | v70.17,77.15 70.17,78.42 69.22,79.38 62.23,79.38 61.28,78.42 61.28,78.03
T_DIN  (via drill 0.9 pad 1.8)
  Top 0.102: 63.82,76.28 63.82,77.95
  Top 0.203: DISP.22 9.53,51.12 6.99,51.12 5.08,53.02 5.08,74.93 9.53,79.38 28.26,79.38 33.34,74.3 62.55,74.3 63.82,75.56 63.82,76.28 | v67.63,77.15 67.63,78.11 66.99,78.74 64.45,78.74 63.82,78.11 63.82,77.95
T_DO  (via drill 0.9 pad 1.8)
  Top 0.203: DISP.26 9.53,53.66 6.99,53.66 5.71,54.93 5.71,74.61 9.84,78.74 27.94,78.74 33.02,73.66 62.87,73.66 65.09,75.88 v65.09,77.15
T_IRQ  (via drill 0.9 pad 1.8)
  Bottom 0.102: 23.65,65.72 25.32,65.72 | 26.04,65.72 27.94,65.72
  Bottom 0.203: DISP.28 13.02,57.47 13.97,58.42 13.97,61.59 18.1,65.72 23.65,65.72 | v62.55,77.15 62.55,75.72 61.91,75.09 29.84,75.09 28.73,73.98 28.73,66.52 27.94,65.72 | 25.32,65.72 26.04,65.72
TEMP  (via drill 0.25, 0.9 pad 1.8)  (1 unrouted)
  Bottom 0.102: 26.19,50.48 27.78,50.48
  Bottom 0.203: v24.45,49.21 25.72,50.48 26.19,50.48 | 49.69,59.37 39.61,59.37 36.12,55.88 v34.45,55.88 34.45,52.78 33.42,51.75 29.21,51.75 27.94,50.48 27.78,50.48
TUN  (via drill 0.9 pad 1.8)  (1 unrouted)
  Top 0.203: R32.1 45.24,34.92 44.77,34.45 35.88,34.45 32.07,30.64 v32.07,28.89
TUNER  (via drill 0.25)  (2 unrouted)
  Top 0.102: 98.35,81.6 98.35,79.38 | 98.35,77.87 98.35,76.28
  Top 0.203: OK6.3 47.78,48.58 48.58,49.37 53.9,49.37 v55.24,50.72 | v83.5,71.75 96.04,71.75 98.35,74.06 98.35,76.28 | PA_CNTL.2 106.68,84.3 105.65,83.26 104.78,83.26 | 104.78,83.26 99.3,83.26 98.35,82.31 98.35,81.6 | 104.78,81.6 104.78,83.26 | 98.35,77.87 98.35,79.38
  Bottom 0.203: v55.24,50.72 55.8,50.72 56.04,50.48 58.98,50.48 59.37,50.88 59.37,51.51 59.93,52.07 77.63,52.07 82.07,56.52 82.07,70.8 83.03,71.75 v83.5,71.75
TXD  (via drill 0.9 pad 1.8)
  Bottom 0.203: v60.01,77.15 60.01,82.39 61.28,83.66 UART.3
TXIN  (via drill 0.25, 0.9 pad 1.8)  (1 unrouted)
  Top 0.102: 46.04,28.1 46.04,29.69
  Top 0.203: v39.69,20.32 46.04,26.67 46.04,28.1 | v44.61,31.91 46.04,30.48 46.04,29.69
  Bottom 0.102: 25.4,45.4 23.65,45.4
  Bottom 0.203: v39.69,20.32 41.12,20.32 41.91,21.11 41.91,22.54 42.23,22.86 OK5.4 | v26.99,46.67 25.72,45.4 25.4,45.4 | v44.61,31.91 44.45,32.07 21.43,32.07 20.8,32.7 20.8,44.45 21.75,45.4 23.65,45.4
  Bottom 0.254: v39.69,20.32 40.64,20.32
TXL  (1 unrouted)
  Top 0.203: PA_CNTL.8 121.92,81.44
TXL_MCU  (via drill 0.25, 0.9 pad 1.8)  (1 unrouted)
  Top 0.203: OK20.4 v128.11,70.17 | v86.92,77.15 86.92,83.42 88.74,85.25 v97.16,85.25
  Bottom 0.203: v97.16,85.25 99.85,85.25 102.87,88.27 128.11,88.27 129.22,87.15 129.22,71.28 v128.11,70.17
TXOUT  (via drill 0.9 pad 1.8)  (1 unrouted)
  Top 0.203: v24.45,46.67 22.54,46.67 21.75,45.88 21.75,33.02 22.07,32.7 R46.1
VC  (via drill 0.9 pad 1.8)  (1 unrouted)
  Top 0.203: R29.1 56.04,32.54 57.47,31.11 v57.47,28.89
WAIT  (1 unrouted)
  Bottom 0.203: 84.45,69.06 97.47,69.06 101.6,73.18 114.46,73.18 116.84,75.56 PA_CNTL.6
WAIT_MCU  (via drill 0.9 pad 1.8)  (2 unrouted)
  Bottom 0.203: 89.46,77.23 89.46,73.9 89.38,73.82 89.38,72.87
  other vias: 89.46,77.15
WR  (via drill 0.9 pad 1.8)
  Bottom 0.203: DISP.9 9.53,33.34 15.88,33.34 17.78,35.24 17.78,52.39 19.68,54.29 v24.45,54.29
Y_A  (1 unrouted)
  Top 0.305: OK1.2 43.18,8.89 42.55,8.26 40.96,8.26 38.73,6.03 33.34,6.03 32.07,4.76 YA_BCD.2
Y_B  (1 unrouted)
  Top 0.305: OK2.2 38.1,8.57 36.2,6.67 31.43,6.67 29.53,4.76 YA_BCD.3
Y_C  (1 unrouted)
  Top 0.305: OK3.2 33.02,8.89 31.43,7.3 29.53,7.3 26.99,4.76 YA_BCD.4
Y_D  (1 unrouted)
  Top 0.305: OK4.2 27.94,7.94 24.45,4.45 YA_BCD.5
(copper drawn outside any net)
  shapes: Top area x3

## Text on the board
Top: REV 3c | DJ1YR
Bottom: DJ1YR
tPlace: VJP | Arduino Due